# Altium PCB PCB3.PcbDoc (part 2 of 2)
Units mm, origin at the board's own origin, x right, y up, seen from the top; angles counter-clockwise.
Board outline 95 x 84.16 mm, 2 copper layers (Top Layer, Bottom Layer); 165 components, 99 nets, 457 pads, 1500 vias.
Unrouted connection lines stored in the file: 1.
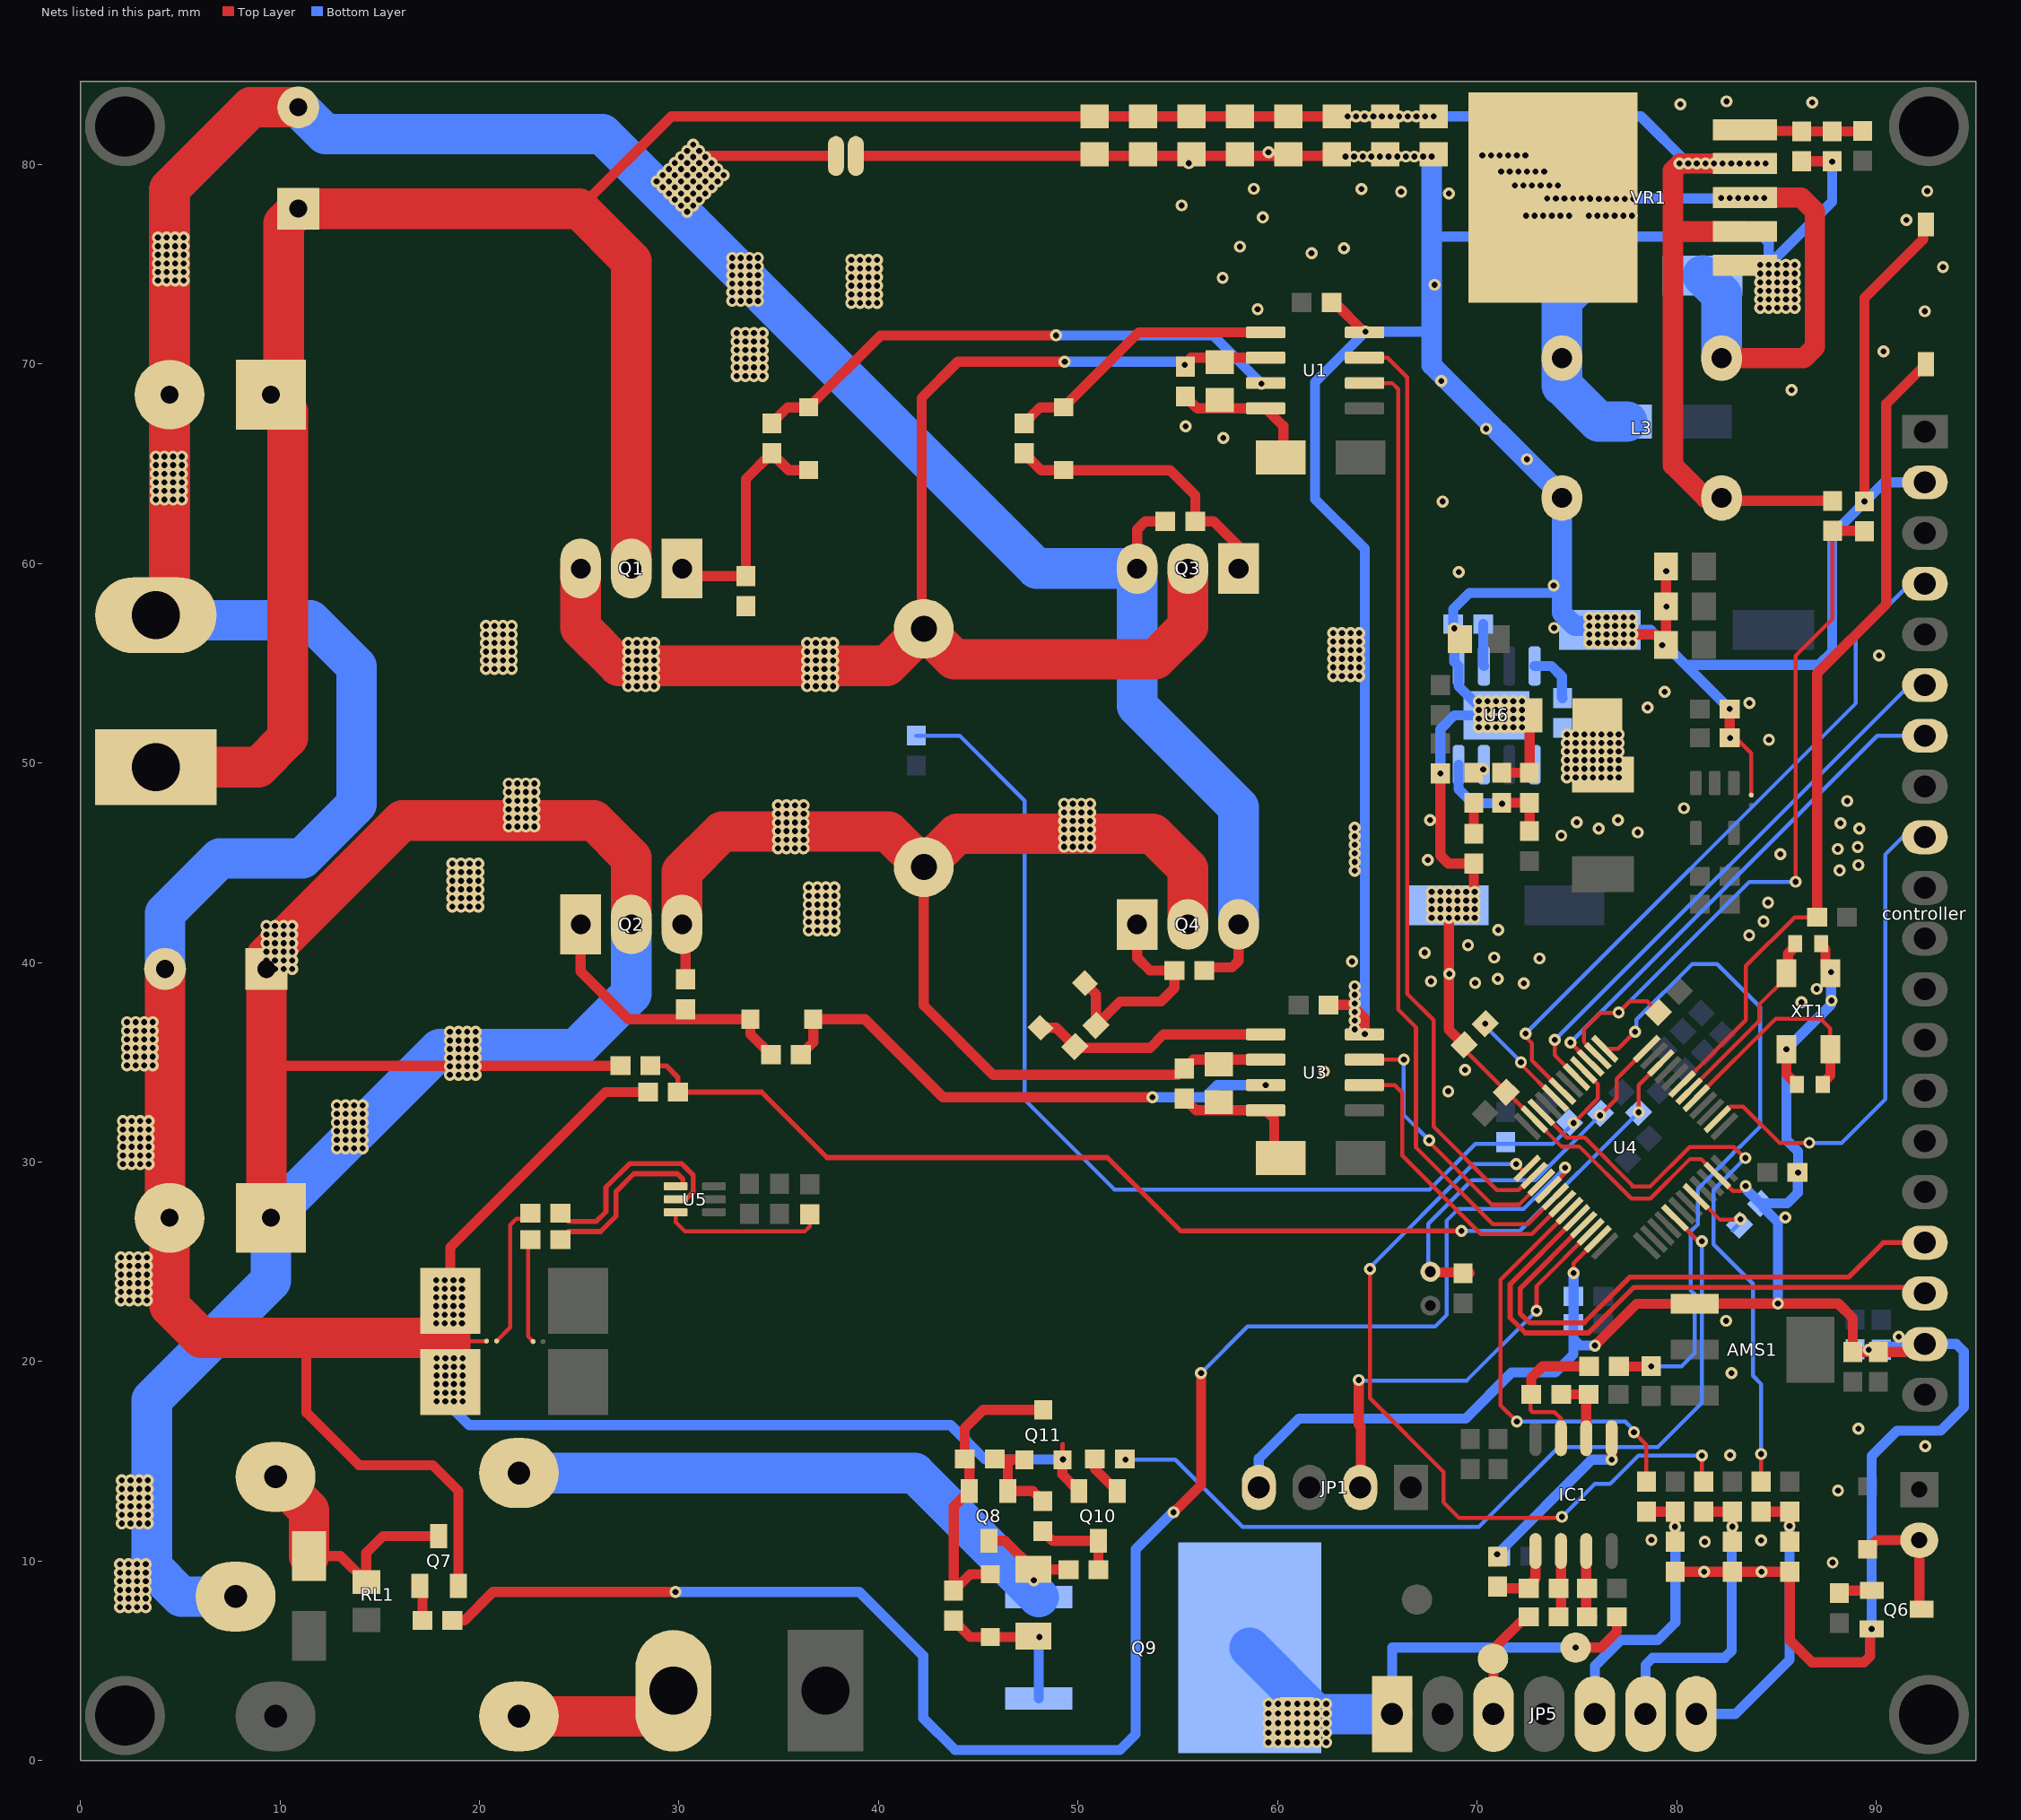
[diagram p2: the nets of this part, all layers, seen from the top]

## Via types
v1: diameter 0.6, hole 0.3, Top Layer to Bottom Layer, tented both sides, 1500 vias

## Nets (pads, with @x,y where several pads share a name; then routed paths per layer and width w, separated by ;. In a path a pad name is that pad's centre, name@x,y a point inside that pad or via, vN(x,y) a via of type N, cw(c..) or ccw(c..) an arc to the next point about the centre after c; other vN are vias at no path point) (continued)
GND: AMS1.1 BT1.2 C1.2 C8.1 C13.2 C14.2 C17.2 C18.2 C21.2 C24.2 C25.2 C31.1 C32.1 C37.2 C38.2 C39.2 C40.2 C41.2 C42.1 C44.2 C45.2 C46.2 C47.2 C48.2 C49.2 C52.2 C53.2 C57.1 C58.1 C59.1 C?.2 controller.2 controller.19 D11.1 JP1.4 L3.2 NT3.2 NT4.1 Q6.2 R22.2 R23.2 R28.1 R36.1 R37.1 R38.1 R39.1 R50.1 U1.4 U3.4 U4.23 U4.35 U4.47 U6.5 U6.9 VR1.1 XT1.G | length 337.7
  Top Layer w0.203: R28.1@69.345,35.868 69.345,35.652 U4.23@72.857,32.14 74.212,30.785 75.108,30.785 77.724,28.169 78.677,28.169 80.662,30.153 81.207,30.153 U4.47@82.032,29.328 82.813,28.548 83.2,28.548 v1(83.445,28.793) ; v1(74.828,24.435) 74.828,24.936 U4.35@76.039,26.146 ; C53.2@82.652,51.562 83.73,50.483 NT4.1@83.73,48.387 ; C49.2@86.043,29.489 86.055,29.489 v1(86.081,29.464)
  Top Layer w0.508: NT3.2@38.862,80.416 62.241,80.416 62.328,80.503 62.441,80.391 v1(63.398,80.391) ; C21.2@62.548,37.871 63.703,37.871 64.364,37.211 v1(64.364,36.412) ; C1.2@62.701,73.076 62.851,73.076 U1.4@64.349,71.577 64.368,71.577 v1(64.407,71.616) ; v1(68.151,49.477) 68.151,45.361 68.557,44.955 R39.1@69.828,44.955 69.828,43.488 69.723,43.383 69.807,43.383 v1@69.882,43.458 ; v1(68.58,42.24) 68.58,36.633 R28.1@69.345,35.868 ; C42.1@71.225,49.503 R36.1@72.622,49.503 D11.1@72.622,51.783 ; v1(75.895,20.803) 77.992,22.899 81.25,22.899 81.256,22.905 85.059,22.905 v1(85.065,22.911) 88.087,22.911 88.824,22.174 C45.2@88.824,20.486 ; v1(77.775,56.439) 78.932,56.439 C38.2@79.462,55.909 C18.2@79.462,59.846 ; C59.1@79.912,9.473 C58.1@82.786,9.473 C8.1@85.659,9.473 85.659,6.035 86.766,4.928 89.383,4.928 89.687,5.232 89.687,6.528 v1(89.764,6.604) ; C53.2@82.652,51.562 v1(82.652,52.705) ; v1(85.494,35.654) 85.494,34.405 85.844,34.055 85.919,34.055 86.015,33.959 C31.1@86.015,33.884 ; R50.1@86.258,80.149 C57.1@87.782,80.149 ; C32.1@87.239,40.945 87.239,40.87 87.448,40.661 XT1.G@87.448,39.777 ; C45.2@88.653,20.486 91.422,20.486 91.815,20.879 controller.19@92.888,20.879 ; v1(89.408,63.107) 89.408,73.297 92.335,76.224 92.335,76.836 BT1.2@92.481,76.982
  Bottom Layer w0.508: JP1.4@59.055,13.691 59.055,15.138 61.062,17.145 69.418,17.145 71.73,19.456 73.914,19.456 74.815,20.357 74.815,21.146 ; v1(64.364,36.412) 64.364,60.731 61.874,63.221 61.874,69.083 v1(64.407,71.616) 67.271,71.616 67.716,71.171 ; 67.716,76.378 84.31,76.378 84.607,76.08 v1(84.607,74.955) 87.782,78.13 v1(87.782,80.137) ; v1(68.151,49.477) 68.151,51.692 68.845,52.386 70.525,52.386 69.066,53.845 U6.5@69.066,54.861 68.851,55.076 v1(68.851,56.741) ; R38.1@68.798,56.958 68.798,57.709 69.611,58.522 74.244,58.522 ; v1(74.828,24.435) 74.828,21.908 C13.2@74.815,21.895 74.815,21.146 ; v1(75.895,20.803) 75.159,20.803 74.815,21.146 ; C37.2@77.775,56.667 78.689,56.667 80.493,54.864 ; v1(82.652,52.705) 80.493,54.864 ; v1(83.445,28.793) 83.445,28.664 R22.2@84.198,27.912 84.216,27.929 85.536,27.929 86.063,28.456 86.063,29.446 v1(86.081,29.464) 86.077,29.468 86.077,30.526 85.494,31.109 v1(85.494,35.654) 87.732,37.893 v1(87.732,39.522) ; R22.2@84.483,27.912 84.329,27.757 84.329,27.73 85.065,26.994 v1(85.065,22.911) ; v1(89.611,20.599) v1(89.611,20.599) 90.1,20.598 90.247,20.745 92.297,20.745 controller.19@92.431,20.879 ; v1(89.764,6.604) 89.764,15.265 91.034,16.535 93.218,16.535 94.386,17.704 94.386,20.498 94.005,20.879 controller.19@92.888,20.879 ; controller.2@92.888,64.059 90.399,64.059 87.782,61.443 87.782,55.575 87.122,54.915 80.543,54.915 80.493,54.864
  Bottom Layer w1.016: v1(67.716,80.391) 67.716,76.378 67.716,71.171 67.716,69.937 74.244,63.409 L3.2@74.244,63.282 74.244,58.522 74.244,57.516 74.889,56.871 v1(75.616,56.871)
  other v1: 81.367,9.466 84.24,9.466 87.808,9.928 81.4,10.966 84.219,11.042 78.728,11.066 88.08,13.531 82.67,15.309 92.449,15.766 89.096,16.63 82.746,19.424 91.127,21.24 82.466,22.04 85.438,27.222 68.547,33.546 62.324,34.537 69.385,34.613 63.856,36.652 63.856,37.084 63.856,37.516 63.856,37.948 63.856,37.948 86.251,38.017 87.75,38.093 63.856,38.379 87.013,38.677 63.856,38.811 72.332,38.957 69.893,38.982 67.684,39.058 71.036,39.185 68.598,39.43 63.721,40.049 73.119,40.201 70.846,40.25 67.371,40.491 69.536,40.865 83.63,41.366 71.057,41.628 84.346,42.055 67.716,42.24 68.148,42.24 69.012,42.24 69.444,42.24 69.875,42.24 67.716,42.672 68.148,42.672 68.58,42.672 69.012,42.672 69.444,42.672 69.875,42.672 84.575,42.995 67.716,43.104 68.148,43.104 68.58,43.104 69.012,43.104 69.444,43.104 69.875,43.104 67.716,43.536 68.148,43.536 68.58,43.536 69.012,43.536 69.444,43.536 69.875,43.536 63.856,44.602 88.152,44.611 89.096,44.875 63.856,45.034 67.531,45.129 85.184,45.434 63.856,45.466 88.061,45.687 89.07,45.789 63.856,45.898 63.856,45.898 63.856,46.33 74.209,46.363 78.043,46.52 76.091,46.704 89.147,46.704 63.856,46.761 88.207,46.983 74.981,47.017 67.633,47.135 77.056,47.135 80.363,47.735 88.535,48.094 84.617,51.153 82.67,51.25 70.079,51.791 70.51,51.791 70.942,51.791 71.374,51.791 71.806,51.791 72.238,51.791 70.079,52.222 70.51,52.222 70.942,52.222 71.374,52.222 71.806,52.222 72.238,52.222 70.079,52.654 70.51,52.654 70.942,52.654 71.374,52.654 71.806,52.654 72.238,52.654 78.544,52.779 83.635,53.003 70.079,53.086 70.51,53.086 70.942,53.086 71.374,53.086 71.374,53.086 71.806,53.086 72.238,53.086 79.394,53.57 62.789,54.356 63.221,54.356 63.652,54.356 64.084,54.356 62.789,54.788 63.221,54.788 63.652,54.788 64.084,54.788 62.789,55.22 63.221,55.22 63.652,55.22 64.084,55.22 90.137,55.39 62.789,55.651 62.789,55.651 63.221,55.651 63.652,55.651 64.084,55.651 79.266,55.898 75.616,56.007 76.048,56.007 76.479,56.007 76.911,56.007 77.343,56.007 77.775,56.007 62.789,56.083 63.221,56.083 63.652,56.083 64.084,56.083 75.616,56.439 76.048,56.439 76.479,56.439 76.911,56.439 77.343,56.439 62.789,56.515 63.221,56.515 63.652,56.515 64.084,56.515 73.849,56.77 76.048,56.871 76.479,56.871 76.911,56.871 77.343,56.871 77.775,56.871 75.616,57.302 76.048,57.302 76.479,57.302 76.911,57.302 76.911,57.302 77.343,57.302 77.775,57.302 79.48,57.832 73.83,58.896 69.077,59.566 79.469,59.607 68.271,63.101 72.484,65.22 57.27,66.287 70.452,66.744 55.39,66.871 85.756,68.685 68.205,69.135 90.366,70.63 92.423,72.636 58.997,72.739 84.176,72.796 84.607,72.796 85.039,72.796 85.471,72.796 85.903,72.796 84.176,73.228 84.607,73.228 85.039,73.228 85.471,73.228 85.903,73.228 84.176,73.66 84.607,73.66 85.039,73.66 85.471,73.66 85.903,73.66 67.861,73.958 84.176,74.092 84.607,74.092 85.039,74.092 85.471,74.092 85.903,74.092 57.244,74.313 84.176,74.524 84.607,74.524 85.039,74.524 85.471,74.524 85.903,74.524 93.338,74.847 84.176,74.955 85.039,74.955 85.471,74.955 85.903,74.955 61.695,75.543 63.315,75.787 58.113,75.869 91.509,77.209 59.251,77.336 55.191,77.936 68.574,78.532 66.185,78.631 92.55,78.657 58.798,78.771 64.204,78.758 55.542,80.054 63.83,80.391 64.262,80.391 64.694,80.391 65.126,80.391 65.557,80.391 65.989,80.391 66.421,80.391 66.853,80.391 67.285,80.391 59.538,80.601 80.18,83 86.784,83.102 82.492,83.153
Green: GREEN.1 JP5.3 R32.2 | length 5.5
  Top Layer w0.508: JP5.3@70.815,2.337 70.815,5.601 R32.2@72.427,7.214
H_sense1: C59.2 JP5.5 R41.1 R53.1 | length 14.3
  Top Layer w0.508: R53.1@78.476,12.483 79.642,12.483 R41.1@79.776,12.35 ; v1(79.912,11.728) R41.1@79.912,12.483
  Bottom Layer w0.508: JP5.5@75.895,2.337 75.895,4.75 77.191,6.045 79.045,6.045 79.934,6.934 79.934,11.735 79.927,11.728 v1(79.912,11.728)
H_sense2: C58.2 JP5.6 R26.1 R54.1 | length 15.5
  Top Layer w0.508: R54.1@81.349,12.483 R26.1@82.786,12.483 v1(82.786,11.728)
  Bottom Layer w0.508: JP5.6@78.435,2.337 78.435,4.801 78.791,5.156 82.398,5.156 82.753,5.512 82.753,11.735 82.779,11.735 v1(82.786,11.728)
handle_inp1: R53.2 U4.31 | length 21.2
  Top Layer w0.203: v1(71.984,16.993) 71.171,17.805 71.171,24.107 U4.31@74.625,27.561 ; v1(77.851,16.459) 78.476,15.834 R53.2@78.476,13.983
  Bottom Layer w0.203: v1(71.984,16.993) 77.419,16.993 77.876,16.535 77.876,16.485 v1(77.851,16.459)
handle_inp2: R54.2 U4.25 | length 39.4
  Top Layer w0.203: v1(64.618,24.638) 64.618,18.161 68.301,14.478 68.301,12.954 69.088,12.167 74.193,12.167 v1(74.244,12.217) ; v1(71.958,29.896) 72.304,29.55 72.435,29.682 U4.25@72.503,29.682 ; v1(81.255,15.291) 81.255,14.078 R54.2@81.349,13.983
  Bottom Layer w0.203: v1(64.618,24.638) 64.618,24.714 69.799,29.896 v1(71.958,29.896) ; v1(74.244,12.217) 75.895,13.868 76.657,13.868 78.08,15.291 v1(81.255,15.291)
heater: R48.1 U4.41 | length 42.8
  Top Layer w0.203: U4.41@79.905,27.207 U4.41@79.911,27.207 81.083,26.035 v1(81.255,26.035)
  Bottom Layer w0.203: v1(52.371,15.085) 54.867,15.085 58.242,11.709 70.079,11.709 74.092,15.723 79.045,15.723 81.255,17.932 v1(81.255,26.035)
HS1: D1.1 Q1.1 R5.2 R43.1 | length 12.3
  Top Layer w0.508: Q1.1@30.15,59.741 30.531,59.36 R43.1@33.35,59.36 33.35,64.223 R5.2@34.646,65.519 35.496,64.668 D1.1@36.5,64.668
HS2: D4.1 Q2.1 R12.2 R44.2 | length 14.1
  Top Layer w0.508: Q2.1@25.07,41.91 25.07,40.931 25.07,39.548 27.457,37.16 D4.1@33.579,37.16 33.579,36.41 R12.2@34.607,35.382
IO: JP1.2 U4.34 | length 20.9
  Top Layer w0.203: v1(72.974,22.555) 72.974,23.789 U4.34@75.685,26.5
  Top Layer w0.508: v1(64.064,19.075) 64.064,16.841 64.16,16.744 64.16,13.716 JP1.2@64.135,13.691
  Bottom Layer w0.203: v1(64.064,19.075) 64.089,19.05 69.469,19.05 v1(72.974,22.555)
led: controller.9 U4.2 | length 25.4
  Top Layer w0.203: U4.2@82.032,32.14 82.671,32.779 83.325,32.779 85.141,30.963 v1(86.639,30.963)
  Bottom Layer w0.203: v1(86.639,30.963) 88.265,30.963 90.449,33.147 90.449,45.415 91.313,46.279 controller.9@92.888,46.279
LS1: D3.1 Q3.1 R7.2 R58.1 | length 14.6
  Top Layer w0.508: R7.2@47.295,65.519 48.145,64.668 D3.1@49.276,64.668 54.61,64.668 55.868,63.41 R58.1@55.868,62.103 56.794,62.103 58.039,60.858 Q3.1@58.039,59.741
LS2: D6.1 Q4.1 R13.2 R59.1 | length 11.7
  Top Layer w0.508: D6.1@50.339,38.96 50.899,38.4 R13.2@50.899,36.852 52.095,38.049 54.153,38.049 54.825,38.722 R59.1@54.825,39.599 53.594,39.599 52.959,40.234 Q4.1@52.959,41.91
MOSI: controller.6 U4.17 | length 28.7
  Top Layer w0.203: v1(73.889,36.119) 73.889,35.351 U4.17@74.978,34.261
  Bottom Layer w0.203: v1(73.889,36.119) 91.382,53.612 92.601,53.612 controller.6@92.888,53.899
NetC2_1: C2.1 C3.2 D2.2 U1.8 | length 7.6
  Top Layer w0.508: C2.1@55.372,68.363 55.968,67.767 57.096,67.767 U1.8@59.399,67.767 60.281,66.886 D2.2@60.281,64.846
NetC6_2: C6.2 D9.1 Q7.3 RL1.4 | length 13.5
  Top Layer w0.508: D9.1@11.455,10.255 13.029,10.255 C6.2@14.329,8.955 14.329,10.417 15.169,11.258 Q7.3@17.963,11.258
  Top Layer w2.032: RL1.4@9.779,14.224 11.455,12.548 D9.1@11.455,10.255
NetC11_1: C11.1 D11.2 L2.1 U6.1 | length 0
  Bottom Layer w0.508: v1@75.692,50.698 v1@75.717,50.698
  other v1: 74.498,49.276 74.498,49.276 74.93,49.276 75.362,49.276 75.794,49.276 76.225,49.276 76.657,49.276 77.089,49.276 74.498,49.708 74.498,49.708 74.93,49.708 75.362,49.708 75.794,49.708 76.225,49.708 76.657,49.708 77.089,49.708 74.498,50.14 74.498,50.14 74.498,50.14 74.93,50.14 75.362,50.14 75.794,50.14 76.225,50.14 76.225,50.14 76.657,50.14 76.657,50.14 77.089,50.14 77.089,50.14 74.498,50.571 74.498,50.571 74.498,50.571 74.93,50.571 75.362,50.571 75.794,50.571 76.225,50.571 76.225,50.571 76.225,50.571 76.657,50.571 76.657,50.571 76.657,50.571 77.089,50.571 77.089,50.571 77.089,50.571 74.498,51.003 74.498,51.003 74.93,51.003 75.362,51.003 75.794,51.003 76.225,51.003 76.657,51.003 77.089,51.003 74.498,51.435 74.498,51.435 74.93,51.435 75.362,51.435 75.794,51.435 75.794,51.435 75.794,51.435 76.225,51.435 76.225,51.435 76.225,51.435 76.657,51.435 76.657,51.435 76.657,51.435 77.089,51.435 77.089,51.435 77.089,51.435
NetC11_2: C11.2 U6.8 | length 2.7
  Bottom Layer w0.508: U6.8@72.876,54.861 73.714,54.861 74.244,54.331 74.244,53.279 C11.2@74.273,53.251
NetC22_2: C22.2 C23.2 D5.2 U3.8 | length 6.9
  Top Layer w0.508: C22.2@55.321,33.184 55.917,32.588 U3.8@59.399,32.588 59.824,32.164 D5.2@59.824,30.201
NetC31_2: C31.2 U4.5 XT1.1 | length 11.5
  Top Layer w0.203: U4.5@80.972,33.2 84.957,37.186 87.198,37.186 87.694,36.69 XT1.1@87.694,35.654
  Top Layer w0.508: C31.2@87.315,33.884 87.315,33.959 87.694,34.337 XT1.1@87.694,35.654
NetC32_2: C32.2 U4.6 XT1.3 | length 9.6
  Top Layer w0.203: U4.6@80.618,33.554 84.125,37.061 84.125,37.886 85.494,39.254 XT1.3@85.494,39.454
  Top Layer w0.508: XT1.3@85.494,39.454 85.573,39.534 85.573,40.439 85.985,40.851 C32.2@85.985,40.926
NetC35_1: C35.1 R39.2 | length 1.5
  Top Layer w0.508: R39.2@69.828,46.455 C35.1@69.828,48.003
NetC35_2: C35.2 U6.3 | length 0.6
  Top Layer w0.508: C35.2@69.828,49.503 70.128,49.503 70.307,49.682 v1(70.297,49.682)
NetC36_1: C36.1 L3.4 VR1.3 VR1.6 | length 27.8
  Top Layer w0.508: VR1.3@83.236,78.283 83.287,78.334 VR1.3@83.422,78.334
  Top Layer w1.016: L3.4@82.244,70.282 86.36,70.282 86.919,70.841 86.919,77.648 86.233,78.334 VR1.3@83.422,78.334
  Bottom Layer w0.508: v1(75.641,78.308) v1(75.667,78.283) v1@83.236,78.283
  Bottom Layer w2.032: C36.1@81.284,74.422 82.244,73.462 L3.4@82.244,70.282
  other v1: 72.441,77.419 72.873,77.419 73.304,77.419 73.304,77.419 73.736,77.419 74.168,77.419 74.6,77.419 75.59,77.419 76.022,77.419 76.454,77.419 76.454,77.419 76.886,77.419 77.318,77.419 77.749,77.419 73.508,78.283 73.939,78.283 74.371,78.283 74.371,78.283 74.803,78.283 75.235,78.283 75.664,78.272 76.096,78.272 76.528,78.272 76.959,78.272 76.959,78.272 77.391,78.272 77.823,78.272 82.22,78.308 82.652,78.308 83.083,78.308 83.083,78.308 83.515,78.308 83.947,78.308 84.379,78.308 71.882,78.943 72.314,78.943 72.746,78.943 72.746,78.943 73.177,78.943 73.609,78.943 74.041,78.943 71.196,79.629 71.628,79.629 72.06,79.629 72.06,79.629 72.492,79.629 72.923,79.629 73.355,79.629 70.257,80.451 70.689,80.451 71.12,80.451 71.12,80.451 71.552,80.451 71.984,80.451 72.416,80.451
NetC36_2: C36.2 D14.1 L3.3 | length 10
  Bottom Layer w2.032: C36.2@75.484,74.422 74.244,73.182 L3.3@74.244,70.282 74.244,68.91 74.27,68.91 76.073,67.107 D14.1@77.502,67.107
NetC42_2: C42.2 R30.1 R36.2 U6.4 | length 6.5
  Top Layer w0.508: C42.2@71.247,48.003 R36.2@72.622,48.003 R30.1@72.622,46.582
  Bottom Layer w0.508: U6.4@69.066,49.911 69.066,48.689 69.774,47.981 71.222,47.981 v1(71.247,47.955)
NetC43_2: C43.2 IC1.5 R10.1 | length 8.9
  Top Layer w0.508: v1(70.993,10.338) 71.018,10.312 R10.1@71.018,10.224 ; v1(76.733,15.088) 76.733,16.109 76.708,16.135 IC1.5@76.733,16.16
  Bottom Layer w0.508: v1(70.993,10.338) 75.743,15.088 v1(76.733,15.088)
NetC57_2: C57.2 R46.1 R50.2 VR1.5 | length 5.9
  Top Layer w0.508: VR1.5@83.422,81.734 83.481,81.674 R50.2@86.258,81.674 ; R50.2@86.258,81.649 89.281,81.649 R46.1@89.306,81.674
NetD1_2: D1.2 R5.1 U1.7 | length 27.4
  Top Layer w0.508: R5.1@34.646,67.019 35.445,67.818 D1.2@36.5,67.818 40.106,71.425 v1(48.895,71.425)
  Bottom Layer w0.508: v1(48.895,71.425) 56.769,71.425 v1(59.182,69.012)
NetD3_2: D3.2 R7.1 U1.5 | length 14
  Top Layer w0.508: R7.1@47.295,67.019 48.094,67.818 D3.2@49.276,67.818 53.035,71.577 U1.5@59.399,71.577
NetD4_2: D4.2 R12.1 U3.7 | length 26.6
  Top Layer w0.508: R12.1@36.107,35.382 36.729,36.004 D4.2@36.729,37.16 39.319,37.16 43.231,33.249 v1(53.721,33.249)
  Bottom Layer w0.508: v1(53.721,33.249) 56.363,33.249 56.972,33.858 v1(59.399,33.858)
NetD6_2: D6.2 R13.1 U3.5 | length 12
  Top Layer w0.508: D6.2@48.112,36.732 48.897,36.732 R13.1@49.838,35.792 49.917,35.712 53.594,35.712 54.28,36.398 U3.5@59.399,36.398
NetD8_1: D8.1 H1.2 Q6.3 | length 6.3
  Top Layer w0.508: D8.1@89.56,10.592 90.018,11.049 H1.2@92.151,11.049 92.151,7.697 Q6.3@92.264,7.584
NetD10_1: D10.1 D13.1 Q9.1 R49.2 | length 7.7
  Top Layer w0.508: R49.2@43.764,7.022 44.589,6.198 v1(48.057,6.198)
  Bottom Layer w0.508: Q9.1@48.029,3.115 48.029,6.17 v1(48.057,6.198)
NetD13_2: D13.2 Q8.2 Q11.2 R25.2 R49.1 | length 15.1
  Top Layer w0.508: D13.2@45.593,9.347 44.589,9.347 R49.1@43.764,8.522 43.764,12.725 Q8.2@44.552,13.513 44.552,14.883 R25.2@44.322,15.113 44.322,16.661 45.243,17.582 Q11.2@48.26,17.582
NetIC1_1: IC1.1 R10.2 R31.2 | length 3.5
  Top Layer w0.508: R10.2@71.018,8.724 71.107,8.636 72.427,8.636 72.923,9.132 IC1.1@72.923,10.51
NetIC1_2: IC1.2 R31.1 R32.1 | length 3.4
  Top Layer w0.508: R32.1@73.927,7.214 74.193,7.48 74.193,8.636 IC1.2@74.193,10.51
NetIC1_3: IC1.3 R40.1 R42.1 | length 3.4
  Top Layer w0.508: IC1.3@75.463,10.51 75.463,8.636 75.463,7.53 R40.1@75.78,7.214
NetIC1_6: IC1.6 R33.2 R35.1 | length 3.6
  Top Layer w0.508: R33.2@73.978,18.352 75.399,18.352 75.463,18.288 IC1.6@75.463,16.16
NetIC1_7: IC1.7 R15.1 R33.1 | length 7.4
  Top Layer w0.203: R33.1@72.707,18.364 72.669,18.327 72.669,17.577 72.771,17.475 73.863,17.475 74.193,17.145 IC1.7@74.193,16.16
  Top Layer w0.508: R33.1@72.707,18.364 72.707,19.189 73.279,19.761 R15.1@75.602,19.761
NetNT1_2: NT1.2 R47.1 | length 5.3
  Top Layer w0.203: R47.1@22.555,26.111 22.428,25.984 22.428,21.262 NT1.2@22.686,21.004
NetNT2_2: NT2.2 R51.1 | length 7.4
  Top Layer w0.203: NT2.2@20.857,21.029 21.539,21.711 21.539,26.848 21.844,27.153 22.276,27.153 R51.1@22.555,27.432
NetQ6_1: Q6.1 R3.2 | length 1.7
  Top Layer w0.508: R3.2@88.138,8.395 88.272,8.529 Q6.1@89.769,8.529
NetQ7_1: Q7.1 R9.1 | length 1.8
  Top Layer w0.508: Q7.1@17.018,8.763 17.144,8.637 R9.1@17.144,7.036
NetQ8_1: Q8.1 Q11.1 R25.1 R52.2 | length 5.1
  Top Layer w0.508: R25.1@45.822,15.113 45.852,15.082 46.581,15.082 ; Q11.1@47.31,15.082 46.581,15.082 ; R52.2@48.235,13.005 47.732,13.507 Q8.1@46.477,13.507 46.477,14.978 46.581,15.082
NetQ10_1: Q10.1 R48.2 | length 2.1
  Top Layer w0.508: R48.2@50.837,15.113 50.837,14.633 Q10.1@51.963,13.507
NetQ10_3: Q10.3 R45.1 R52.1 | length 4.4
  Top Layer w0.508: R52.1@48.235,11.505 48.727,11.013 Q10.3@51.018,11.013 51.018,9.578 R45.1@51.017,9.576
NetR22_1: R22.1 U4.44 | length 3.4
  Top Layer w0.203: U4.44@80.972,28.268 81.003,28.268 82.169,27.102 83.16,27.102 v1(83.185,27.127)
  Bottom Layer w0.203: R22.1@82.779,26.568 83.185,26.975 v1(83.185,27.127)
NetR28_2: R28.2 U4.20 | length 5.2
  Top Layer w0.203: v1(72.187,35.001) 72.187,34.9 73.886,33.2 U4.20@73.918,33.2
  Bottom Layer w0.203: v1(70.406,36.929) 70.358,36.881 70.358,36.855 72.187,35.027 v1(72.187,35.001)
NetR38_2: R38.2 U6.6 | length 2.1
  Bottom Layer w0.508: R38.2@70.298,56.958 70.298,54.898 U6.6@70.336,54.861
NetRF2_1: RF2.1 U5.6 | length 8.1
  Top Layer w0.203: U5.6@29.833,27.481 29.833,26.987 30.302,26.518 36.297,26.518 36.551,26.772 RF2.1@36.551,27.381
PGND: C15.2 C16.2 C33.2 C34.2 KF1.2 NT2.1 NT3.1 Q3.3 Q4.3 Q7.2 Q10.2 Q11.3 R6.1 R24.2 R58.2 R59.2 R?.1 | length 287.1
  Top Layer w0.203: 18.542,21.184 18.697,21.029 NT2.1@20.357,21.029 ; Q11.3@49.21,15.082 49.21,15.86 49.225,15.875 49.225,15.117 v1(49.241,15.101)
  Top Layer w0.508: 11.328,21.184 11.328,17.45 13.97,14.808 17.655,14.808 18.943,13.52 Q7.2@18.943,8.758 ; R?.1@18.542,23.038 18.542,25.731 26.314,33.503 R24.2@28.448,33.503 ; v1(29.489,78.537) 29.566,78.537 31.445,80.416 NT3.1@37.862,80.416 ; Q11.3@49.21,15.082 49.21,14.341 Q10.2@50.038,13.513 ; Q3.3@52.959,59.741 52.959,61.701 53.361,62.103 R58.2@54.368,62.103 ; R59.2@56.325,39.599 56.478,39.751 57.709,39.751 58.039,40.081 Q4.3@58.039,41.91
  Top Layer w2.032: KF1.2@3.785,57.404 4.47,58.09 C33.2@4.47,68.453 4.47,78.765 8.56,82.855 C16.2@10.922,82.855 ; C15.2@4.242,39.675 4.242,27.432 C34.2@4.47,27.203 4.47,22.784 6.071,21.184 11.328,21.184 18.542,21.184 ; R6.1@18.542,18.974 18.542,21.184 ; R?.1@18.542,23.038 18.542,21.184
  Bottom Layer w0.508: v1(18.288,18.009) 19.482,16.815 43.612,16.815 45.325,15.101 v1(49.241,15.101)
  Bottom Layer w2.032: C15.2@4.242,39.675 4.242,42.469 6.985,45.212 11.125,45.212 13.843,47.93 13.843,54.839 11.532,57.15 4.039,57.15 KF1.2@3.785,57.404 4.47,58.09 C33.2@4.47,68.453 4.47,78.765 8.56,82.855 C16.2@10.922,82.855 12.268,81.509 26.162,81.509 47.93,59.741 Q3.3@52.959,59.741 52.959,52.857 58.039,47.777 Q4.3@58.039,41.91
  other v1: 17.856,18.009 18.72,18.009 19.152,18.009 17.856,18.44 18.288,18.44 18.72,18.44 19.152,18.44 17.856,18.872 18.288,18.872 18.72,18.872 19.152,18.872 17.856,19.304 18.288,19.304 18.72,19.304 19.152,19.304 17.856,19.736 18.288,19.736 18.72,19.736 19.152,19.736 17.856,20.168 18.288,20.168 18.72,20.168 19.152,20.168 17.831,21.92 18.263,21.92 18.694,21.92 19.126,21.92 17.831,22.352 18.263,22.352 18.694,22.352 19.126,22.352 17.831,22.784 18.263,22.784 18.694,22.784 19.126,22.784 2.032,23.063 2.464,23.063 2.896,23.063 3.327,23.063 17.831,23.216 18.263,23.216 18.694,23.216 19.126,23.216 2.032,23.495 2.464,23.495 2.896,23.495 3.327,23.495 17.831,23.647 18.263,23.647 18.694,23.647 19.126,23.647 2.032,23.927 2.464,23.927 2.896,23.927 3.327,23.927 17.831,24.079 18.263,24.079 18.694,24.079 19.126,24.079 2.032,24.359 2.032,24.359 2.464,24.359 2.896,24.359 3.327,24.359 2.032,24.79 2.464,24.79 2.896,24.79 3.327,24.79 2.032,25.222 2.464,25.222 2.896,25.222 3.327,25.222 2.134,29.896 2.565,29.896 2.997,29.896 3.429,29.896 2.134,30.328 2.565,30.328 2.997,30.328 3.429,30.328 2.134,30.759 2.565,30.759 2.997,30.759 3.429,30.759 2.134,31.191 2.134,31.191 2.565,31.191 2.997,31.191 3.429,31.191 2.134,31.623 2.565,31.623 2.997,31.623 3.429,31.623 2.134,32.055 2.565,32.055 2.997,32.055 3.429,32.055 2.337,34.849 2.769,34.849 3.2,34.849 3.632,34.849 2.337,35.281 2.769,35.281 3.2,35.281 3.632,35.281 2.337,35.712 2.769,35.712 3.2,35.712 3.632,35.712 2.337,36.144 2.337,36.144 2.769,36.144 3.2,36.144 3.632,36.144 2.337,36.576 2.769,36.576 3.2,36.576 3.632,36.576 2.337,37.008 2.769,37.008 3.2,37.008 3.632,37.008 3.785,63.195 4.216,63.195 4.648,63.195 5.08,63.195 3.785,63.627 4.216,63.627 4.648,63.627 5.08,63.627 3.785,64.059 4.216,64.059 4.648,64.059 5.08,64.059 3.785,64.491 3.785,64.491 4.216,64.491 4.648,64.491 5.08,64.491 3.785,64.922 4.216,64.922 4.648,64.922 5.08,64.922 3.785,65.354 4.216,65.354 4.648,65.354 5.08,65.354 32.893,69.393 33.325,69.393 33.757,69.393 34.188,69.393 32.893,69.825 33.325,69.825 33.757,69.825 34.188,69.825 32.893,70.256 33.325,70.256 33.757,70.256 34.188,70.256 32.893,70.688 32.893,70.688 33.325,70.688 33.757,70.688 34.188,70.688 32.893,71.12 33.325,71.12 33.757,71.12 34.188,71.12 32.893,71.552 33.325,71.552 33.757,71.552 34.188,71.552 38.633,73.05 39.065,73.05 39.497,73.05 39.929,73.05 32.664,73.152 33.096,73.152 33.528,73.152 33.96,73.152 38.633,73.482 39.065,73.482 39.497,73.482 39.929,73.482 32.664,73.584 33.096,73.584 33.528,73.584 33.96,73.584 38.633,73.914 39.065,73.914 39.497,73.914 39.929,73.914 32.664,74.016 33.096,74.016 33.528,74.016 33.96,74.016 3.886,74.168 4.318,74.168 4.75,74.168 5.182,74.168 38.633,74.346 38.633,74.346 39.065,74.346 39.497,74.346 39.929,74.346 32.664,74.447 32.664,74.447 33.096,74.447 33.528,74.447 33.96,74.447 3.886,74.6 4.318,74.6 4.75,74.6 5.182,74.6 38.633,74.778 39.065,74.778 39.497,74.778 39.929,74.778 32.664,74.879 33.096,74.879 33.528,74.879 33.96,74.879 3.886,75.032 4.318,75.032 4.75,75.032 5.182,75.032 38.633,75.209 39.065,75.209 39.497,75.209 39.929,75.209 32.664,75.311 33.096,75.311 33.528,75.311 33.96,75.311 3.886,75.463 3.886,75.463 4.318,75.463 4.75,75.463 5.182,75.463 3.886,75.895 4.318,75.895 4.75,75.895 5.182,75.895 3.886,76.327 4.318,76.327 4.75,76.327 5.182,76.327 30.405,77.621 30.1,77.926 30.711,77.926 29.795,78.231 30.405,78.231 31.016,78.231 29.489,78.537 29.489,78.537 30.1,78.537 30.711,78.537 31.321,78.537 31.321,78.537 29.184,78.842 29.795,78.842 30.405,78.842 31.016,78.842 31.016,78.842 31.627,78.842 28.879,79.147 29.489,79.147 30.1,79.147 30.711,79.147 30.711,79.147 31.321,79.147 31.932,79.147 29.184,79.453 29.795,79.453 30.405,79.453 30.405,79.453 30.405,79.453 31.016,79.453 31.627,79.453 32.237,79.453 29.489,79.758 30.1,79.758 30.1,79.758 30.711,79.758 31.321,79.758 31.932,79.758 29.795,80.063 29.795,80.063 30.405,80.063 31.016,80.063 31.627,80.063 30.1,80.369 30.711,80.369 31.321,80.369 30.405,80.674 31.016,80.674 30.711,80.979
Power+: KF2.2 RL1.2 | length 17.2
  Top Layer w2.032: RL1.2@21.979,2.224 28.437,2.224 KF2.2@29.718,3.505 ; KF2.2@29.604,3.619 KF2.2@30.074,4.089
  Bottom Layer w2.032: RL1.2@21.979,2.224 28.437,2.224 KF2.2@29.718,3.505
PowerSolider+: D10.2 Q8.3 Q9.3 R45.2 RL1.3 | length 33.8
  Top Layer w0.508: Q8.3@45.532,11.013 46.339,11.013 D10.2@47.752,9.6 ; v1(47.777,9.042) 47.752,9.068 D10.2@47.752,9.6 ; R45.2@49.517,9.576 47.776,9.576 D10.2@47.752,9.6
  Bottom Layer w2.032: RL1.3@21.979,14.416 41.809,14.416 Q9.3@48.029,8.195
Red: D15.2 JP5.1 Q9.2 R40.2 RED.1 | length 24.3
  Top Layer w0.508: D15.2@60.96,1.937 60.992,1.937 D15.2@61.036,1.981 ; v1(74.93,5.664) 76.194,5.664 77.001,6.471 R40.2@77.001,7.214
  Bottom Layer w0.508: JP5.1@65.735,2.337 65.735,5.664 v1(74.93,5.664)
  Bottom Layer w2.032: Q9.2@58.601,5.655 61.919,2.337 JP5.1@65.735,2.337
  other v1: 59.538,0.914 60.02,0.914 60.503,0.914 60.985,0.914 61.468,0.914 61.951,0.914 62.433,0.914 59.538,1.397 60.02,1.397 60.503,1.397 60.985,1.397 61.468,1.397 61.951,1.397 62.433,1.397 59.538,1.88 60.02,1.88 60.503,1.88 60.985,1.88 61.468,1.88 61.951,1.88 62.433,1.88 59.538,2.362 60.02,2.362 60.503,2.362 60.985,2.362 61.468,2.362 61.951,2.362 62.433,2.362 59.538,2.845 60.02,2.845 60.503,2.845 60.985,2.845 61.468,2.845 61.951,2.845 62.433,2.845
RESET: BT1.1 R27.1 U4.7 | length 41.8
  Top Layer w0.203: U4.7@80.265,33.907 83.464,37.107 83.464,39.827 85.903,42.266 R27.1@87.032,42.266
  Top Layer w0.508: R27.1@87.032,42.266 87.032,54.495 90.5,57.963 90.5,68.001 BT1.1@92.481,69.982
RST: controller.4 U4.19 | length 34.9
  Top Layer w0.203: v1(72.419,36.435) 72.419,36.274 72.741,35.952 72.741,35.084 U4.19@74.271,33.554
  Bottom Layer w0.203: v1(72.419,36.435) 88.976,52.992 88.976,56.261 91.669,58.953 controller.4@92.456,58.953
S_sense: C8.2 JP5.7 R16.1 R56.1 | length 14.7
  Top Layer w0.508: R56.1@84.222,12.483 R16.1@85.659,12.483 v1@85.659,11.76
  Bottom Layer w0.508: JP5.7@80.975,2.337 82.931,2.337 85.649,5.055 v1(85.649,11.76)
SCK: controller.7 U4.15 | length 26.5
  Top Layer w0.203: v1(74.676,35.992) 75.685,34.982 U4.15@75.685,34.968
  Bottom Layer w0.203: v1(74.676,35.992) 90.043,51.359 controller.7@92.888,51.359 ; controller.7@91.999,51.333 controller.7@92.456,51.333
SO_N: R51.2 U5.5 | length 10.9
  Top Layer w0.254: R51.2@24.055,27.432 24.462,27.026 25.857,27.026 26.34,27.508 26.34,28.735 27.526,29.921 30.132,29.921 30.708,29.345 30.708,29.068 30.708,28.495 30.658,28.445 30.344,28.131 U5.5@29.833,28.131
SO_P: R47.2 U5.4 | length 9.1
  Top Layer w0.254: R47.2@24.055,26.111 24.462,26.518 26.068,26.518 26.848,27.298 26.848,28.524 27.737,29.413 29.921,29.413 30.2,29.135 30.2,28.781 U5.4@29.833,28.781
stand_inp: R56.2 U4.22 | length 30.7
  Top Layer w0.203: U4.22@73.21,32.493 74.487,31.217 75.387,31.217 77.775,28.829 77.775,28.778 78.664,28.778 80.645,30.759 82.848,30.759 83.407,30.201 v1(83.439,30.201) ; R56.2@84.222,13.983 84.226,13.987 v1(84.226,15.367)
  Bottom Layer w0.203: v1(83.439,30.201) 81.839,28.6 81.839,25.868 83.814,23.892 83.814,19.284 84.226,18.872 v1(84.226,15.367)
switch: R9.2 U4.28 | length 86.5
  Top Layer w0.203: U4.28@73.564,28.621 74.397,29.454 v1(74.397,29.718)
  Top Layer w0.508: R9.2@18.644,7.036 19.253,7.036 20.676,8.458 v1(29.82,8.458) ; v1(54.788,12.446) 56.159,13.818 v1(56.159,19.431)
  Bottom Layer w0.203: v1(56.159,19.431) 58.496,21.768 67.894,21.768 68.478,22.352 68.478,27.076 69.063,27.661 72.339,27.661 v1(74.397,29.718)
  Bottom Layer w0.508: v1(29.82,8.458) 39.04,8.458 42.24,5.258 42.24,2.134 43.84,0.533 52.095,0.533 52.883,1.321 52.883,10.592 v1@54.813,12.522
temp_fet: C5.2 NTC1.2 R4.2 U4.12 | length 20.7
  Top Layer w0.203: v1(76.149,32.334) 76.987,33.172 76.987,34.166 U4.12@78.497,35.675
  Top Layer w0.508: NTC1.2@67.652,24.504 67.687,24.47 NTC1.2@67.771,24.47 ; NTC1.2@67.736,24.504 NTC1.2@67.771,24.47 ; NTC1.2@67.818,24.423 NTC1.2@67.771,24.47 ; R4.2@69.621,24.435 69.587,24.47 NTC1.2@67.771,24.47
  Bottom Layer w0.203: NTC1.2@67.614,24.504 67.614,24.106 NTC1.2@67.652,24.106 ; NTC1.2@67.792,24.106 NTC1.2@67.652,24.106 ; v1(76.149,32.334) 72.898,29.083 69.723,29.083 67.543,26.903 67.543,24.614 NTC1.2@67.652,24.504 NTC1.2@67.652,24.106
temp_inductor: C60.2 NTC2.1 R34.2 U4.16 | length 56
  Top Layer w0.203: v1(74.828,31.953) 76.048,33.172 76.048,33.899 U4.16@75.332,34.615
  Bottom Layer w0.203: NTC2.1@41.885,51.372 44.056,51.372 47.32,48.108 47.32,33.122 51.816,28.626 67.615,28.626 69.901,30.912 71.425,30.912 73.787,30.912 v1(74.828,31.953)
temp_solid: C7.2 R15.2 U4.13 | length 33.7
  Top Layer w0.203: U4.13@76.392,35.675 77.052,35.675 v1(77.902,36.525)
  Top Layer w0.508: R15.2@76.899,19.749 78.447,19.749 C7.2@78.461,19.763 ; v1(78.715,19.761) C7.2@78.715,19.775
  Bottom Layer w0.203: v1(77.902,36.525) 77.973,36.597 77.973,37.13 80.772,39.929 82.017,39.929 84.176,37.77 84.176,31.775 83.18,30.78 83.159,30.78 82.834,30.455 82.834,30.434 81.051,28.651 81.051,26.873 80.701,26.522 80.701,23.568 80.894,23.375 80.894,20.421 80.235,19.761 v1(78.715,19.761)
TIM1_CH1: U1.2 U4.29 | length 49.3
  Top Layer w0.203: U1.2@64.349,69.037 65.735,69.037 66.04,68.732 66.04,37.643 66.929,36.754 66.929,30.734 70.78,26.883 72.533,26.883 U4.29@73.918,28.268
TIM1_CH1N: U1.3 U4.26 | length 47.3
  Top Layer w0.203: U1.3@64.349,70.307 65.507,70.307 66.497,69.317 66.497,38.43 67.818,37.109 67.818,31.775 70.993,28.6 72.061,28.6 72.788,29.328 U4.26@72.857,29.328
TIM1_CH2: U3.2 U4.30 | length 15.5
  Top Layer w0.203: U3.2@64.349,33.858 65.862,33.858 66.243,33.477 66.243,30.328 70.182,26.388 72.745,26.388 U4.30@74.271,27.914
TIM1_CH2N: U3.3 U4.27 | length 14
  Top Layer w0.203: U3.3@64.349,35.128 v1(66.319,35.128) ; v1(67.589,31.09) 67.589,31.013 70.739,27.864 72.1,27.864 U4.27@73.21,28.975
  Bottom Layer w0.203: v1(66.319,35.128) 66.319,32.36 v1(67.589,31.09)
USB_N: controller.18 U4.32 | length 29
  Top Layer w0.254: U4.32@74.978,27.207 71.646,23.875 71.646,22.2 72.408,21.438 75.572,21.438 77.858,23.724 92.583,23.724 controller.18@92.888,23.419
USB_P: controller.17 U4.33 | length 28.4
  Top Layer w0.254: U4.33@75.332,26.853 75.337,26.848 72.154,23.665 72.154,22.41 72.619,21.946 75.362,21.946 77.648,24.232 88.621,24.232 90.348,25.959 controller.17@92.888,25.959
V_IN: C16.1 C33.1 C39.1 C40.1 C41.1 C?.1 KF1.1 L3.1 Q1.2 R20.1 VR1.2 VR1.4 | length 160
  Top Layer w0.508: 24.994,77.775 29.622,82.403 62.328,82.403 65.046,82.403 v1(67.815,82.403) ; L3.1@82.244,63.282 82.394,63.132 R20.1@87.808,63.132
  Top Layer w1.016: L3.1@82.244,63.282 81.447,63.282 79.807,64.922 79.807,76.708 ; VR1.2@83.422,76.634 79.881,76.634 79.807,76.708 ; VR1.4@83.422,80.034 80.161,80.034 79.807,79.68 79.807,76.708
  Top Layer w2.032: KF1.1@3.785,49.784 8.915,49.784 10.389,51.257 10.389,67.615 C33.1@9.55,68.453 10.185,69.088 10.185,77.038 C16.1@10.922,77.775 24.994,77.775 27.61,75.159 Q1.2@27.61,59.741
  Bottom Layer w0.508: v1(67.815,82.403) 78.201,82.403 v1(80.569,80.035) v1@83.363,80.035
  other v1: 80.137,80.035 81.001,80.035 81.001,80.035 81.432,80.035 81.864,80.035 82.296,80.035 82.296,80.035 82.728,80.035 83.16,80.035 83.16,80.035 83.591,80.035 84.023,80.035 84.455,80.035 63.497,82.403 63.928,82.403 64.36,82.403 64.36,82.403 64.792,82.403 65.224,82.403 65.656,82.403 65.656,82.403 66.087,82.403 66.519,82.403 66.519,82.403 66.951,82.403 67.383,82.403 67.815,82.403
vin_sense: C29.2 R20.2 R23.1 U4.14 | length 37.7
  Top Layer w0.203: U4.14@76.039,35.322 75.336,36.024 75.336,36.627 76.182,37.473 v1@77.089,37.473 ; v1(77.089,37.49) 77.648,38.049 78.511,38.049 C29.2@79.07,37.49 ; v1(85.954,44.044) 85.954,55.372 87.808,57.226 R20.2@87.808,61.632
  Top Layer w0.508: R20.2@87.808,61.632 89.383,61.632 R23.1@89.408,61.607
  Bottom Layer w0.203: v1(77.089,37.49) 83.642,44.044 v1(85.954,44.044)
Vout_P: C15.1 C34.1 Q2.2 R21.1 RL1.1 | length 107.2
  Top Layer w0.508: 9.322,34.747 9.398,34.823 R21.1@27.063,34.823
  Top Layer w2.032: C34.1@9.55,27.203 9.322,27.432 9.322,34.747 v1(9.322,39.675) 9.322,40.31 16.129,47.117 25.73,47.117 27.61,45.237 Q2.2@27.61,41.91
  Bottom Layer w2.032: RL1.1@7.779,8.224 5.06,8.224 3.581,9.703 3.581,18.085 9.55,24.054 C34.1@9.55,27.203 18.009,35.662 24.841,35.662 27.61,38.43 Q2.2@27.61,41.91
  other v1: 1.981,7.696 2.413,7.696 2.845,7.696 3.277,7.696 1.981,8.128 2.413,8.128 2.845,8.128 3.277,8.128 1.981,8.56 2.413,8.56 2.845,8.56 3.277,8.56 1.981,8.992 1.981,8.992 2.413,8.992 2.845,8.992 3.277,8.992 1.981,9.423 2.413,9.423 2.845,9.423 3.277,9.423 1.981,9.855 2.413,9.855 2.845,9.855 3.277,9.855 2.083,11.887 2.515,11.887 2.946,11.887 3.378,11.887 2.083,12.319 2.515,12.319 2.946,12.319 3.378,12.319 2.083,12.751 2.515,12.751 2.946,12.751 3.378,12.751 2.083,13.183 2.083,13.183 2.515,13.183 2.946,13.183 3.378,13.183 2.083,13.614 2.515,13.614 2.946,13.614 3.378,13.614 2.083,14.046 2.515,14.046 2.946,14.046 3.378,14.046 12.852,30.683 13.284,30.683 13.716,30.683 14.148,30.683 12.852,31.115 13.284,31.115 13.716,31.115 14.148,31.115 12.852,31.547 13.284,31.547 13.716,31.547 14.148,31.547 12.852,31.979 12.852,31.979 13.284,31.979 13.716,31.979 14.148,31.979 12.852,32.41 13.284,32.41 13.716,32.41 14.148,32.41 12.852,32.842 13.284,32.842 13.716,32.842 14.148,32.842 18.517,34.366 18.948,34.366 19.38,34.366 19.812,34.366 18.517,34.798 18.948,34.798 19.38,34.798 19.812,34.798 18.517,35.23 18.948,35.23 19.38,35.23 19.812,35.23 18.517,35.662 18.517,35.662 18.948,35.662 19.38,35.662 19.812,35.662 18.517,36.093 18.948,36.093 19.38,36.093 19.812,36.093 18.517,36.525 18.948,36.525 19.38,36.525 19.812,36.525 9.754,39.675 10.185,39.675 10.617,39.675 9.322,40.107 9.754,40.107 10.185,40.107 10.617,40.107 9.322,40.538 9.754,40.538 10.185,40.538 10.617,40.538 9.322,40.97 9.322,40.97 9.754,40.97 10.185,40.97 10.617,40.97 9.322,41.402 9.754,41.402 10.185,41.402 10.617,41.402 9.322,41.834 9.754,41.834 10.185,41.834 10.617,41.834 18.644,42.799 19.075,42.799 19.507,42.799 19.939,42.799 18.644,43.231 19.075,43.231 19.507,43.231 19.939,43.231 18.644,43.663 19.075,43.663 19.507,43.663 19.939,43.663 18.644,44.094 18.644,44.094 19.075,44.094 19.507,44.094 19.939,44.094 18.644,44.526 19.075,44.526 19.507,44.526 19.939,44.526 18.644,44.958 19.075,44.958 19.507,44.958 19.939,44.958 21.463,46.812 21.895,46.812 22.327,46.812 22.758,46.812 21.463,47.244 21.895,47.244 22.327,47.244 22.758,47.244 21.463,47.676 21.895,47.676 22.327,47.676 22.758,47.676 21.463,48.108 21.463,48.108 21.895,48.108 22.327,48.108 22.758,48.108 21.463,48.539 21.895,48.539 22.327,48.539 22.758,48.539 21.463,48.971 21.895,48.971 22.327,48.971 22.758,48.971
vout_sense: C30.2 R21.2 R24.1 U4.10 | length 58.8
  Top Layer w0.203: v1(78.086,32.493) 78.086,33.85 U4.10@79.204,34.968
  Top Layer w0.254: R21.2@28.563,34.823 29.362,34.823 29.948,34.238 R24.1@29.948,33.503 34.138,33.503 37.414,30.226 51.46,30.226 55.143,26.543 v1(69.215,26.543)
  Bottom Layer w0.203: v1(69.215,26.543) 72.136,26.543 v1(78.086,32.493)
VS1: C2.2 C3.1 L1.1 Q1.3 Q3.2 R43.2 U1.6 | length 69.1
  Top Layer w0.508: L1.1@42.266,56.718 42.164,56.82 42.164,68.301 43.967,70.104 v1(49.327,70.104) ; C2.2@55.372,69.863 55.372,69.926 v1(55.35,69.949) 55.327,69.971 55.663,70.307 U1.6@59.399,70.307
  Top Layer w2.032: Q1.3@25.07,59.741 25.07,56.777 26.982,54.864 40.411,54.864 L1.1@42.266,56.718 43.79,55.194 53.869,55.194 55.499,56.824 Q3.2@55.499,59.741
  Bottom Layer w0.508: v1(49.327,70.104) 55.169,70.104 55.325,69.949 v1(55.35,69.949)
  other v1: 27.457,53.848 27.889,53.848 28.321,53.848 28.753,53.848 36.424,53.848 36.855,53.848 37.287,53.848 37.719,53.848 27.457,54.28 27.889,54.28 28.321,54.28 28.753,54.28 36.424,54.28 36.855,54.28 37.287,54.28 37.719,54.28 20.32,54.712 20.752,54.712 21.184,54.712 21.615,54.712 27.457,54.712 27.889,54.712 28.321,54.712 28.753,54.712 36.424,54.712 36.855,54.712 37.287,54.712 37.719,54.712 20.32,55.143 20.752,55.143 21.184,55.143 21.615,55.143 27.457,55.143 27.457,55.143 27.889,55.143 28.321,55.143 28.753,55.143 36.424,55.143 36.424,55.143 36.855,55.143 37.287,55.143 37.719,55.143 20.32,55.575 20.752,55.575 21.184,55.575 21.615,55.575 27.457,55.575 27.889,55.575 28.321,55.575 28.753,55.575 36.424,55.575 36.855,55.575 37.287,55.575 37.719,55.575 20.32,56.007 20.32,56.007 20.752,56.007 21.184,56.007 21.615,56.007 27.457,56.007 27.889,56.007 28.321,56.007 28.753,56.007 36.424,56.007 36.855,56.007 37.287,56.007 37.719,56.007 20.32,56.439 20.752,56.439 21.184,56.439 21.615,56.439 20.32,56.871 20.752,56.871 21.184,56.871 21.615,56.871
VS2: C22.1 C23.1 L1.2 Q2.3 Q4.2 R44.1 U3.6 | length 62.4
  Top Layer w0.508: Q2.3@30.15,41.91 30.328,41.732 R44.1@30.328,39.155 ; L1.2@42.266,44.78 42.266,37.846 45.745,34.366 55.003,34.366 C22.1@55.321,34.684 55.765,35.128 U3.6@59.399,35.128
  Top Layer w2.032: Q2.3@30.15,41.91 30.15,44.552 32.156,46.558 40.488,46.558 L1.2@42.266,44.78 43.942,46.457 53.746,46.457 55.499,44.704 Q4.2@55.499,41.91
  other v1: 36.5,41.605 36.932,41.605 37.363,41.605 37.795,41.605 36.5,42.037 36.932,42.037 37.363,42.037 37.795,42.037 36.5,42.469 36.932,42.469 37.363,42.469 37.795,42.469 36.5,42.901 36.5,42.901 36.932,42.901 37.363,42.901 37.795,42.901 36.5,43.332 36.932,43.332 37.363,43.332 37.795,43.332 36.5,43.764 36.932,43.764 37.363,43.764 37.795,43.764 34.95,45.72 35.382,45.72 35.814,45.72 36.246,45.72 49.301,45.796 49.733,45.796 50.165,45.796 50.597,45.796 34.95,46.152 35.382,46.152 35.814,46.152 36.246,46.152 49.301,46.228 49.733,46.228 50.165,46.228 50.597,46.228 34.95,46.584 35.382,46.584 35.814,46.584 36.246,46.584 49.301,46.66 49.733,46.66 50.165,46.66 50.597,46.66 34.95,47.015 34.95,47.015 35.382,47.015 35.814,47.015 36.246,47.015 49.301,47.092 49.301,47.092 49.733,47.092 50.165,47.092 50.597,47.092 34.95,47.447 35.382,47.447 35.814,47.447 36.246,47.447 49.301,47.523 49.733,47.523 50.165,47.523 50.597,47.523 34.95,47.879 35.382,47.879 35.814,47.879 36.246,47.879 49.301,47.955 49.733,47.955 50.165,47.955 50.597,47.955
pads on no net: U4.1 U8.4

## Polygon pours and split planes (outlines as drawn)
GND on Bottom Layer "GND_L02_P034" (solid, pour order 34): 54.077,75.87 54.077,66.497 57.429,63.144 59.411,63.144 61.9,60.655 61.9,41.478 58.09,37.668 53.518,37.668 51.41,35.56 51.41,31.801 53.823,29.388 65.227,29.388 69.596,33.757 77.897,25.455 77.897,0.03 77.927,0 94.971,0 94.971,84.15 94.894,84.226 54.051,84.226
AGND on Bottom Layer "AGND_L02_P027" (solid, pour order 27): 19.692,25.215 19.692,26.866 25.516,32.69 49.428,32.69 53.271,28.847 66.53,28.847 77.858,40.176 82.76,40.176 84.157,38.779 84.285,22.851 79.241,22.885 79.241,16.376 58.656,16.376 45.422,16.376 36.583,25.215 19.743,25.215
AGND on Bottom Layer "AGND_L02_P029" (solid, pour order 29): 68.427,16.888 68.427,12.269 72.466,8.23 77.862,8.23 77.901,16.888
+12 on Bottom Layer "+12_L02_P032" (solid, pour order 32): 62.535,66.421 62.535,64.55 62.925,64.16 65.557,64.16 65.888,64.491 65.888,66.37 65.761,66.497 62.611,66.497
+12 on Bottom Layer "+12_L02_P031" (solid, pour order 31): 62.56,31.267 62.56,29.397 62.95,29.007 65.583,29.007 65.913,29.337 65.913,31.217 65.786,31.344 62.636,31.344
NetC36_1 on Bottom Layer "NETC36_1_L02_P024" (solid, pour order 24): 78.715,75.692 78.715,70.002 80.01,68.707 83.388,68.707 83.388,75.692
NetC36_2 on Bottom Layer "NETC36_2_L02_P023" (solid, pour order 23): 69.266,70.129 73.762,65.634 78.816,65.634 79.4,66.218 79.4,68.047 78.791,68.656 76.911,68.656 76.149,69.418 76.149,72.466 76.911,73.228 77.876,73.228 78.435,73.787 78.435,75.743 69.266,75.743
NetC36_1 on Bottom Layer "NETC36_1_L02_P021" (solid, pour order 21): 69.545,81.382 69.545,79.324 71.984,76.886 79.273,76.886 85.522,76.886 86.055,77.419 86.055,78.13 86.055,78.461 85.471,79.045 74.854,79.045 72.212,81.686 69.545,81.686
V_IN on Bottom Layer "V_IN_L02_P020" (solid, pour order 20): 61.468,83.236 61.443,83.21 61.443,81.636 72.263,81.636 74.828,79.07 84.963,79.07 85.344,79.451 85.319,79.477 85.319,80.62 84.938,81.001 81.001,81.001 77.826,84.176 61.468,84.176
PGND on Bottom Layer "NONET_L-01_P-001" (solid, pour order 2): 56.845,38.43 56.871,38.405 62.611,38.405 62.611,51.613 54.331,59.893 54.331,63.729 33.884,84.176 0.025,84.176 0.025,53.543 7.645,53.543 7.645,71.552 28.296,71.552 38.303,61.544 38.532,61.544 45.237,54.839 56.794,43.282 56.794,43.256
Power+ on Bottom Layer "NONET_L-01_P-001" (solid, pour order 13): 18.593,5.182 18.567,5.156 18.567,0.025 33.198,0.025 33.223,0 33.274,0.051 33.274,6.807 32.487,7.595 20.955,7.595 18.593,5.232
PowerSolider+ on Bottom Layer "NONET_L-01_P-001" (solid, pour order 12): 19.609,16.104 19.609,11.379 20.574,10.414 40.615,10.414 44.069,6.96 51.13,6.96 51.13,10.846 47.955,14.021 44.882,14.021 42.647,16.256 19.583,16.256
Vout_P on Bottom Layer "NONET_L-01_P-001" (solid, pour order 10): 7.366,25.349 7.391,25.375 7.391,41.885 15.672,50.165 27,50.165 28.677,48.489 28.677,37.516 16.231,25.349
Red on Bottom Layer "NONET_L-01_P-001" (solid, pour order 4): 66.904,0 66.904,11.024 54.889,11.024 54.838,-0.023
Vout_P on Bottom Layer "NONET_L-01_P-001" (solid, pour order 8): 9.195,42.342 7.518,40.665 7.518,24.282 2.159,18.923 -0.025,18.923 -0.025,0.051 0.025,0 6.528,0 7.061,0.533 7.061,4.293 8.128,5.359 14.224,5.359 16.078,5.359 16.078,42.32
PGND on Bottom Layer "NONET_L-01_P-001" (solid, pour order 6): 7.087,24.384 2.261,19.558 0.025,19.558 0.025,46.736 0.025,64.948 14.427,64.948 17.272,62.103 17.272,46.457 13.894,43.078 9.144,43.078 7.087,41.021 7.087,28.651
AGND on Top Layer "AGND_L01_P026" (solid, pour order 26): 19.685,25.222 19.685,26.873 25.73,32.918 49.2,32.918 53.264,28.854 66.523,28.854 74.729,28.854 79.197,24.386 79.23,24.353 79.197,16.383 58.649,16.383 45.415,16.383 36.576,25.222 19.736,25.222
AGND on Top Layer "AGND_L01_P028" (solid, pour order 28): 68.428,16.891 68.428,10.744 71.825,7.347 77.858,7.347 77.902,16.891
GND on Top Layer "GND_L01_P033" (solid, pour order 33): 54.077,75.87 54.077,66.497 57.429,63.144 59.411,63.144 61.9,60.655 61.9,41.478 58.09,37.668 53.518,37.668 51.41,35.56 51.41,31.801 53.823,29.388 65.227,29.388 69.596,33.757 77.897,25.455 77.897,0.03 77.927,0 94.971,0 94.971,84.15 94.894,84.226 54.051,84.226
GND on Top Layer "GND_L01_P030" (solid, pour order 30): 38.379,80.975 38.379,77.521 39.395,76.505 39.472,76.581 68.555,76.581 69.113,77.14 69.113,80.975
GND on Top Layer "GND_L01_P025" (solid, pour order 25): 81.839,75.463 81.839,72.339 82.271,71.907 86.03,71.907 86.233,72.111 86.233,75.463
V_IN on Top Layer "V_IN_L01_P022" (solid, pour order 22): 85.268,80.797 85.268,80.772 85.268,79.223 81.813,79.223 81.356,78.765 81.356,77.953 81.763,77.546 85.268,77.546 85.598,77.216 85.547,77.165 85.547,75.946 85.395,75.794 81.864,75.794 81.102,75.032 81.102,66.421 82.398,65.126 84.277,65.126 84.836,64.567 84.836,61.874 84.176,61.214 79.299,61.214 77.495,63.017 77.495,79.934 78.588,81.026 85.268,81.026
PGND on Top Layer "PGND_L01_P019" (solid, pour order 19): 28.27,78.638 28.296,78.638 30.378,76.556 39.548,76.556 39.548,81.153 29.743,81.153 27.762,79.172
V_IN on Top Layer "V_IN_L01_P018" (solid, pour order 18): 10.008,78.613 15.494,84.099 68.986,84.099 69.088,83.998 69.088,81.915 68.834,81.661 29.439,81.661 26.391,78.613
VS2 on Top Layer "NONET_L-01_P-001" (solid, pour order 17): 29.108,40.005 29.134,40.03 29.134,47.371 32.36,50.597 53.696,50.597 57.048,47.244 57.048,40.691 56.667,40.31 54.686,40.31 31.75,40.31 31.75,40.03
VS1 on Top Layer "NONET_L-01_P-001" (solid, pour order 16): 25.959,61.443 23.876,63.525 17.526,63.525 15.875,61.874 15.875,55.448 19.329,51.994 55.55,51.994 57.15,53.594 57.15,61.163 56.871,61.443
Power+ on Top Layer "NONET_L-01_P-001" (solid, pour order 14): 18.593,5.182 18.567,5.156 18.567,0.025 33.198,0.025 33.223,0 33.274,0.051 33.274,6.807 32.487,7.595 20.955,7.595 18.593,5.232
Red on Top Layer "NONET_L-01_P-001" (solid, pour order 11): 59.055,3.404 62.052,3.404 62.865,4.216 66.751,4.216 66.751,-0.025 55.626,-0.025
Vout_P on Top Layer "NONET_L-01_P-001" (solid, pour order 9): 7.391,25.489 7.391,41.885 15.672,50.165 27,50.165 28.677,48.489 29.032,37.414 16.534,25.515
PGND on Top Layer "NONET_L-01_P-001" (solid, pour order 5): 20.345,24.79 20.345,16.307 0.838,16.307 0.025,17.12 0.025,43.205 1.321,44.501 1.346,44.475 5.715,44.475 6.909,43.282 6.909,24.79
Blue on Top Layer "NONET_L-01_P-001" (solid, pour order 3): 66.954,0 66.929,0.025 66.929,4.572 66.523,4.978 65.049,4.978 59.563,4.978 54.61,0.025 33.579,0.025 33.579,13.208 30.15,16.637 23.571,16.637 22.86,17.348 22.86,24.486 23.571,25.197 28.931,25.197 33.925,25.197 41.097,18.025 41.097,6.731 42.85,4.978 49.124,4.978 55.143,10.998 67.386,10.998 69.698,8.687 69.698,0.025
V_IN on Top Layer "NONET_L-01_P-001" (solid, pour order 1): 0,46.076 0,53.162 0.991,54.153 6.502,54.153 7.62,55.27 7.62,77.953 10.058,80.391 25.502,80.391 29.312,76.581 29.312,58.471 28.931,58.09 26.619,58.09 25.756,58.953 25.756,61.747 23.444,64.059 17.272,64.059 14.91,61.697 14.91,50.546 10.439,46.076 -0.025,46.076

## Keep-outs
Keep-Out Layer:
  lines w0.254: 2.235,2.311 92.634,2.311 92.634,81.89 2.235,81.89 2.235,2.311
  lines w0.381: 0,0 95,0 95,84.162 0,84.162 0,0

## Other copper
Top Layer:
  region net +12: 70.206,57.339 70.206,53.783 72.314,53.783 72.314,57.339
  region net NetC11_1: 74.146,53.91 74.146,48.195 77.575,48.195 77.575,53.91
Bottom Layer:
  region net NetC11_1: 73.765,52.259 75.035,52.259 75.035,53.275 77.597,53.275 77.597,48.209 72.495,48.209 72.495,50.989 73.13,50.989 73.765,51.624

## Silkscreen, mask and mechanical layers (free items; w line width, h text height)
Bottom Overlay:
  lines w0.254: 27.61,41.91 55.499,41.91 ; 27.61,59.741 55.499,59.741 ; 41.554,41.91 41.554,59.741 41.554,63.151 ; 16.485,16.43 66.485,16.43 66.485,38.43 16.485,38.43 16.485,16.43 ; 16.624,63.221 66.624,63.221 66.624,85.221 16.624,85.221 16.624,63.221